# Altium PCB Twelve Volt Supply Board.PcbDoc
Units mil, origin at the board's own origin, x right, y up, seen from the top; angles counter-clockwise.
Board outline 7000 x 6407.5 mil, 4 copper layers (Top Layer, Power Plane, Ground Plane, Bottom Layer); 43 components, 12 nets, 124 pads, 2 vias.
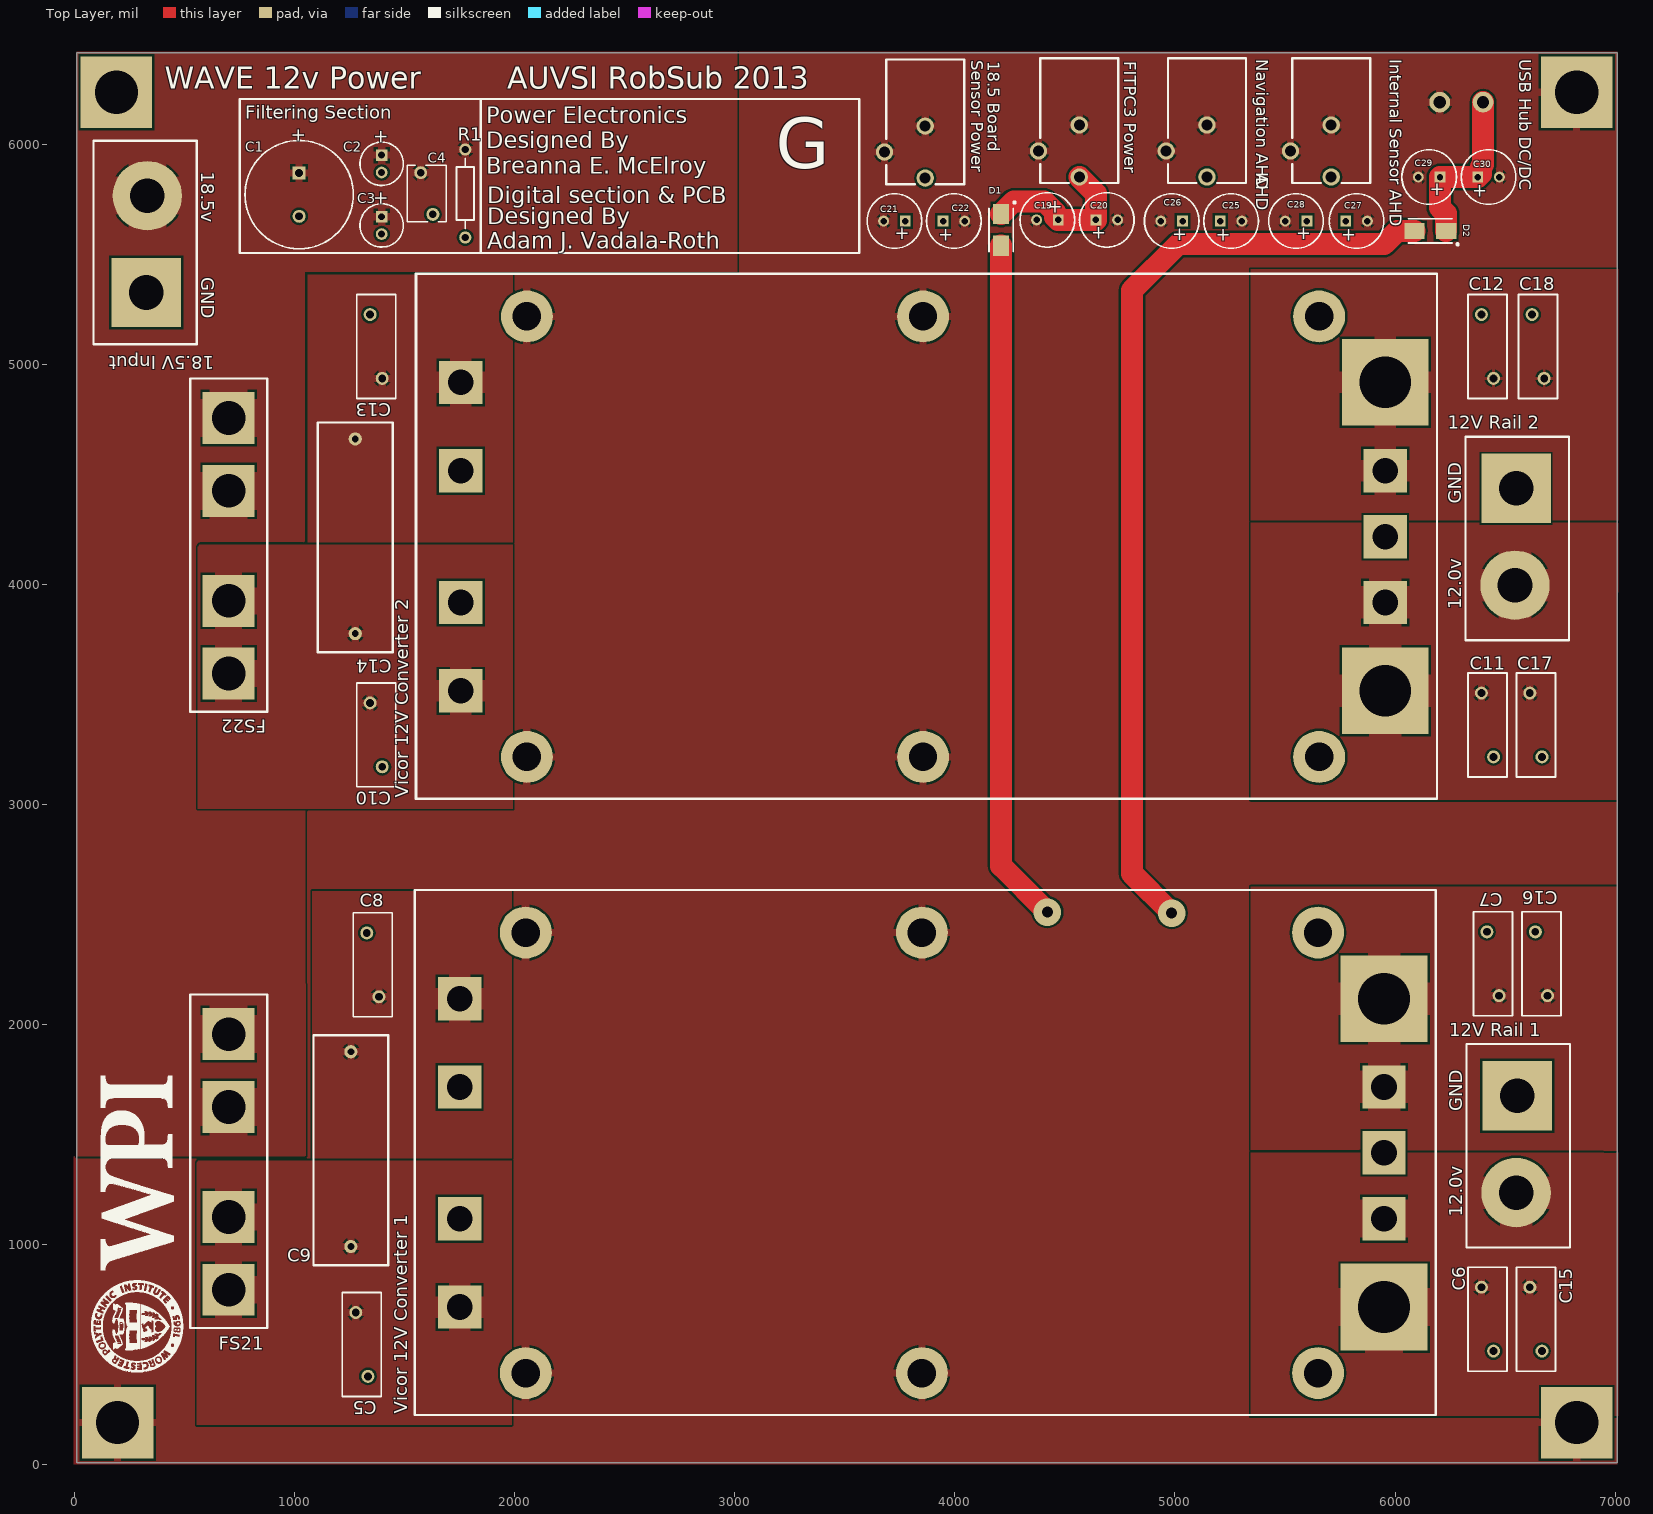
[diagram p0: Top Layer view]
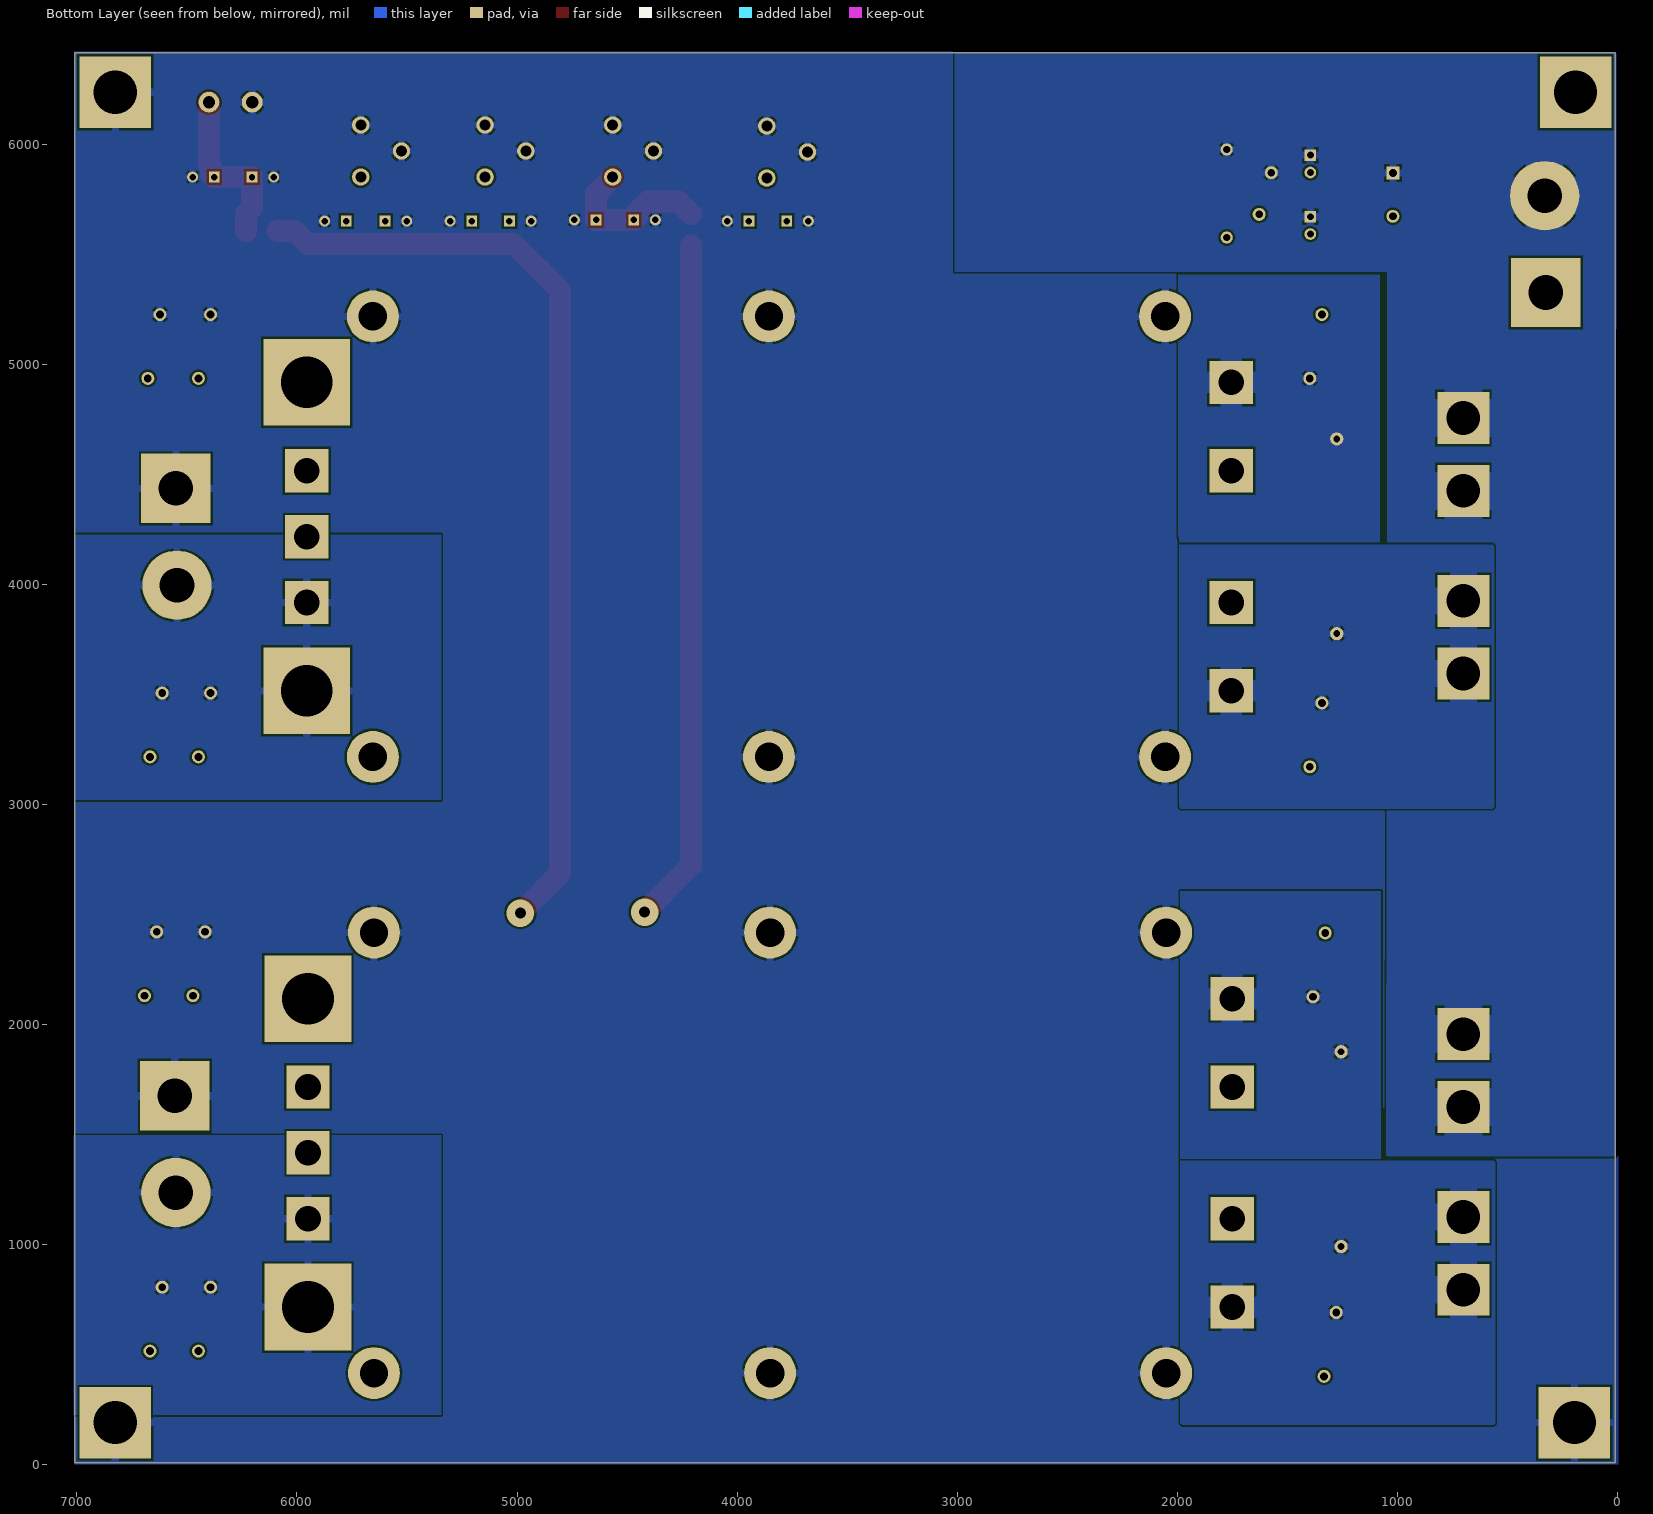
[diagram p1: Bottom Layer view, seen from below]
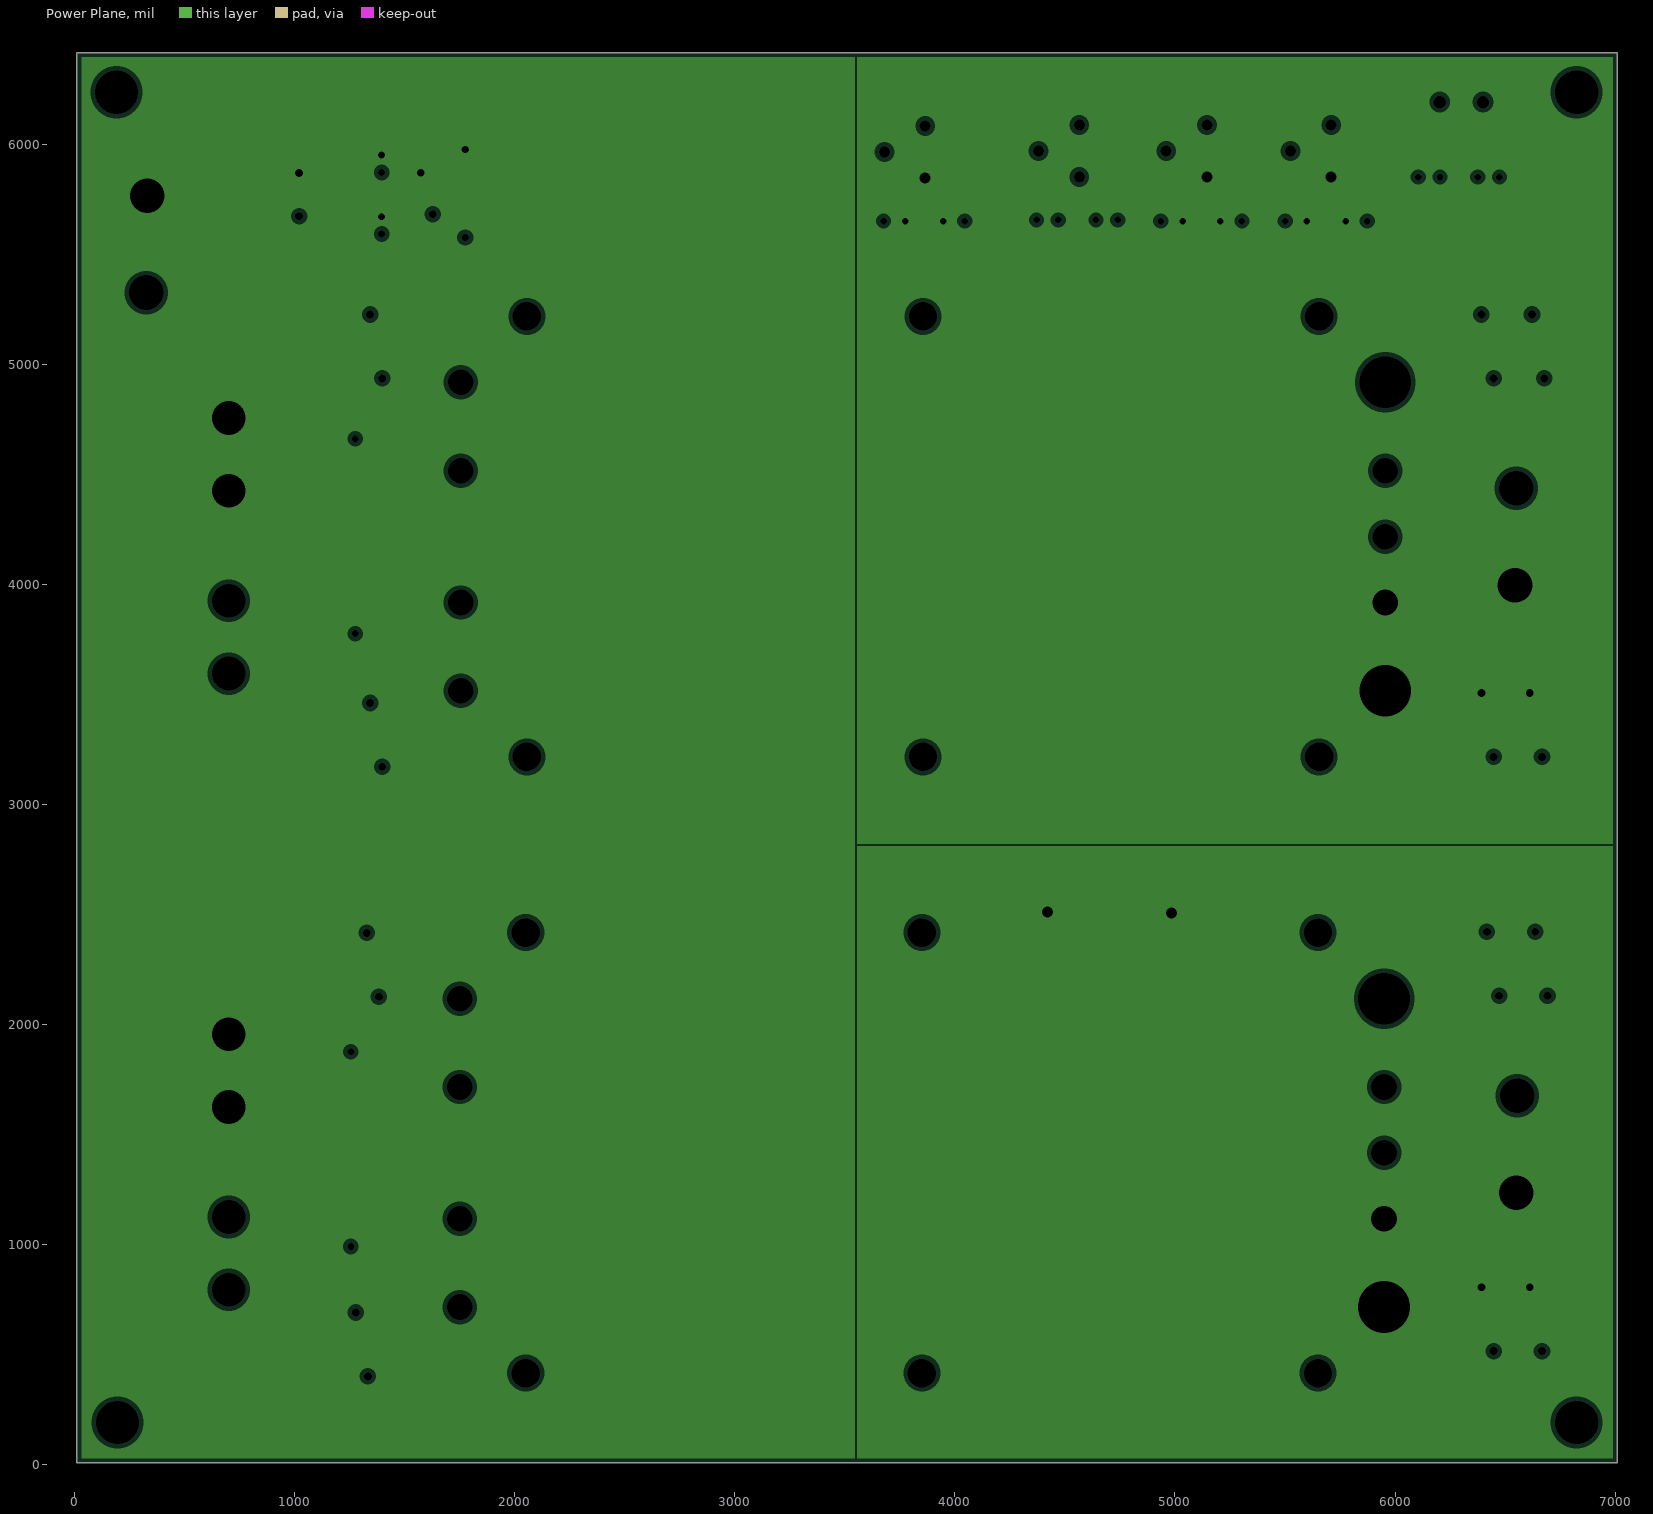
[diagram p2: Power Plane, clearances drawn from the general rule]
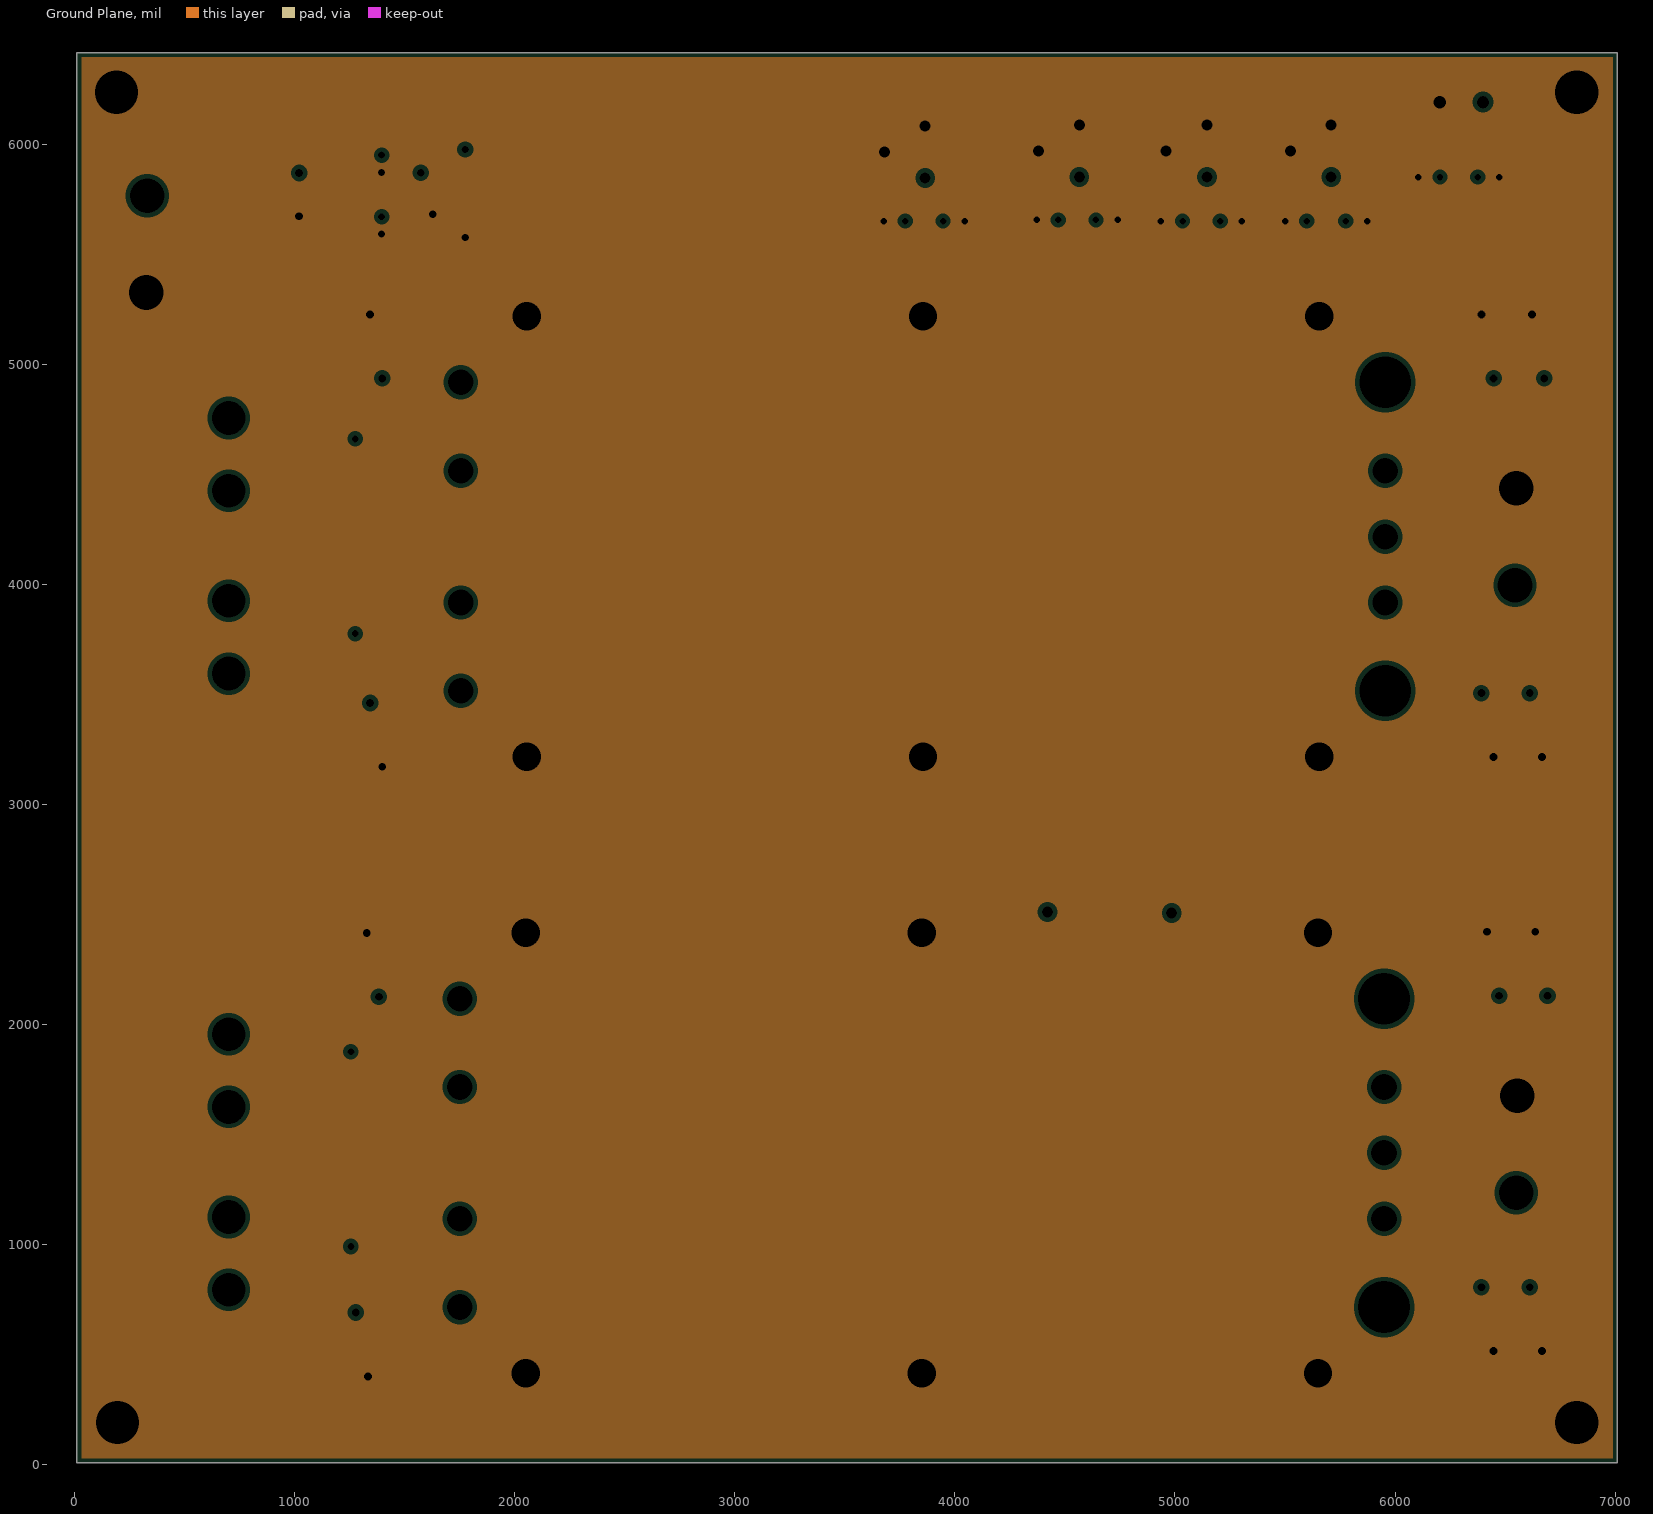
[diagram p3: Ground Plane, clearances drawn from the general rule]

## Layer stack, top to bottom
Top Layer: signal copper 1.4
Dielectric: core 12.6, FR-4, Dk 4.8
Power Plane: plane copper 1.4
Dielectric: prepreg 12.6, FR-4, Dk 4.8
Ground Plane: plane copper 1.4, net GND
Dielectric: core 12.6, FR-4, Dk 4.8
Bottom Layer: signal copper 1.4

## Board outline
10,7.5 7010,7.5 7010,6415 10,6415

## Design rules (kind name [scope] priority, off if disabled: settings)
Clearance [All] p1: gap=10
ComponentClearance [All] p1: gap=10 collisioncheckmode=3 verticalgap=100000 showdistances=FALSE
HoleSize [All] p1: absolutevalues=TRUE maxlimit=200 minlimit=1 maxpercent=80.000 minpercent=20.000
PlaneClearance [All] p1: clearance=20
PlaneConnect PlaneConnect_11 [(InNet('Net12V Rail 2_1') AND InComponent('12V Rail 2'))] p1: planeconnectstyle=Relief reliefexpansion=20 reliefentries=4 reliefconductorwidth=100 reliefairgap=10
PlaneConnect PlaneConnect_10 [(InNet('Net12V Rail 1_1') AND InComponent('12V Rail 1'))] p2: planeconnectstyle=Relief reliefexpansion=20 reliefentries=4 reliefconductorwidth=100 reliefairgap=10
PlaneConnect PlaneConnect_9 [(InNet('18.5VCC') AND InComponent('FS22'))] p3: planeconnectstyle=Relief reliefexpansion=20 reliefentries=4 reliefconductorwidth=100 reliefairgap=10
PlaneConnect PlaneConnect_8 [(InNet('18.5VCC') AND InComponent('FS21'))] p4: planeconnectstyle=Relief reliefexpansion=20 reliefentries=4 reliefconductorwidth=100 reliefairgap=10
PlaneConnect PlaneConnect_7 [(InNet('18.5VCC') AND InComponent('18.5V Input'))] p5: planeconnectstyle=Relief reliefexpansion=20 reliefentries=4 reliefconductorwidth=100 reliefairgap=10
PlaneConnect PlaneConnect_6 [(InNet('Net12V Rail 1_1') AND InComponent('C6'))] p6: planeconnectstyle=Relief reliefexpansion=20 reliefentries=4 reliefconductorwidth=35 reliefairgap=10
PlaneConnect PlaneConnect_5 [(InNet('Net12V Rail 1_1') AND InComponent('C15'))] p7: planeconnectstyle=Relief reliefexpansion=20 reliefentries=4 reliefconductorwidth=35 reliefairgap=10
PlaneConnect PlaneConnect_4 [(InNet('Net12V Rail 2_1') AND InComponent('C17'))] p8: planeconnectstyle=Relief reliefexpansion=20 reliefentries=4 reliefconductorwidth=35 reliefairgap=10
PlaneConnect PlaneConnect_3 [(InNet('Net12V Rail 2_1') AND InComponent('C11'))] p9: planeconnectstyle=Relief reliefexpansion=20 reliefentries=4 reliefconductorwidth=35 reliefairgap=10
PlaneConnect PlaneConnect_2 [(InNet('GND') AND InComponent('C8'))] p10: planeconnectstyle=Relief reliefexpansion=20 reliefentries=4 reliefconductorwidth=35 reliefairgap=10
PlaneConnect PlaneConnect_1 [(InNet('GND') AND InComponent('C5'))] p11: planeconnectstyle=Relief reliefexpansion=20 reliefentries=4 reliefconductorwidth=35 reliefairgap=10
PlaneConnect [All] p12: planeconnectstyle=Relief reliefexpansion=20 reliefentries=4 reliefconductorwidth=35 reliefairgap=15
PolygonConnect PolygonConnect_26 [(InNet('Net12V Rail 1_1') AND InComponent('12V Rail 1'))] p1: connectstyle=Relief reliefconductorwidth=150 reliefentries=4 polygonreliefangle="90 Angle"
PolygonConnect PolygonConnect_25 [(InNet('Net12V Rail 2_1') AND InComponent('12V Rail 2'))] p2: connectstyle=Relief reliefconductorwidth=150 reliefentries=4 polygonreliefangle="90 Angle"
PolygonConnect PolygonConnect_24 [(InNet('NetC12_2') AND InComponent('Vicor 12V Converter 2'))] p3: connectstyle=Relief reliefconductorwidth=150 reliefentries=4 polygonreliefangle="90 Angle"
PolygonConnect PolygonConnect_23 [(InNet('Net12V Rail 2_1') AND InComponent('Vicor 12V Converter 2'))] p4: connectstyle=Relief reliefconductorwidth=150 reliefentries=4 polygonreliefangle="90 Angle"
PolygonConnect PolygonConnect_22 [(InNet('NetC7_2') AND InComponent('Vicor 12V Converter 1'))] p5: connectstyle=Relief reliefconductorwidth=150 reliefentries=4 polygonreliefangle="90 Angle"
PolygonConnect PolygonConnect_21 [(InNet('Net12V Rail 1_1') AND InComponent('Vicor 12V Converter 1'))] p6: connectstyle=Relief reliefconductorwidth=175 reliefentries=4 polygonreliefangle="90 Angle"
PolygonConnect PolygonConnect_20 [(InNet('18.5VCC') AND InComponent('FS21'))] p7: connectstyle=Relief reliefconductorwidth=175 reliefentries=4 polygonreliefangle="90 Angle"
PolygonConnect PolygonConnect_19 [(InNet('18.5VCC') AND InComponent('FS21'))] p8: connectstyle=Relief reliefconductorwidth=175 reliefentries=4 polygonreliefangle="90 Angle"
PolygonConnect PolygonConnect_18 [(InNet('18.5VCC') AND InComponent('FS22'))] p9: connectstyle=Relief reliefconductorwidth=175 reliefentries=4 polygonreliefangle="90 Angle"
PolygonConnect PolygonConnect_17 [(InNet('18.5VCC') AND InComponent('18.5V Input'))] p10: connectstyle=Relief reliefconductorwidth=175 reliefentries=4 polygonreliefangle="90 Angle"
PolygonConnect PolygonConnect_16 [(InNet('NetC10_1') AND InComponent('FS22'))] p11: connectstyle=Relief reliefconductorwidth=125 reliefentries=4 polygonreliefangle="90 Angle"
PolygonConnect PolygonConnect_15 [(InNet('NetC5_1') AND InComponent('FS21'))] p12: connectstyle=Relief reliefconductorwidth=125 reliefentries=4 polygonreliefangle="90 Angle"
PolygonConnect PolygonConnect_14 [(InNet('Net12V Rail 1_1') AND InComponent('C6'))] p13: connectstyle=Relief reliefconductorwidth=35 reliefentries=4 polygonreliefangle="90 Angle"
PolygonConnect PolygonConnect_13 [(InNet('NetC7_2') AND InComponent('C16'))] p14: connectstyle=Relief reliefconductorwidth=35 reliefentries=4 polygonreliefangle="90 Angle"
PolygonConnect PolygonConnect_12 [(InNet('NetC7_2') AND InComponent('C7'))] p15: connectstyle=Relief reliefconductorwidth=35 reliefentries=4 polygonreliefangle="90 Angle"
PolygonConnect PolygonConnect_11 [(InNet('Net12V Rail 2_1') AND InComponent('C17'))] p16: connectstyle=Relief reliefconductorwidth=35 reliefentries=4 polygonreliefangle="90 Angle"
PolygonConnect PolygonConnect_10 [(InNet('Net12V Rail 2_1') AND InComponent('C11'))] p17: connectstyle=Relief reliefconductorwidth=35 reliefentries=4 polygonreliefangle="90 Angle"
PolygonConnect PolygonConnect_9 [(InNet('NetC12_2') AND InComponent('C12'))] p18: connectstyle=Relief reliefconductorwidth=35 reliefentries=4 polygonreliefangle="90 Angle"
PolygonConnect PolygonConnect_8 [(InNet('NetC12_2') AND InComponent('C18'))] p19: connectstyle=Relief reliefconductorwidth=35 reliefentries=4 polygonreliefangle="90 Angle"
PolygonConnect PolygonConnect_7 [(InNet('NetC13_2') AND InComponent('C13'))] p20: connectstyle=Relief reliefconductorwidth=35 reliefentries=4 polygonreliefangle="90 Angle"
PolygonConnect PolygonConnect_6 [(InNet('NetC10_1') AND InComponent('C14'))] p21: connectstyle=Relief reliefconductorwidth=35 reliefentries=4 polygonreliefangle="90 Angle"
PolygonConnect PolygonConnect_5 [(InNet('NetC10_1') AND InComponent('C10'))] p22: connectstyle=Relief reliefconductorwidth=35 reliefentries=4 polygonreliefangle="90 Angle"
PolygonConnect PolygonConnect_4 [(InNet('NetC8_2') AND InComponent('C8'))] p23: connectstyle=Relief reliefconductorwidth=35 reliefentries=4 polygonreliefangle="90 Angle"
PolygonConnect PolygonConnect_3 [(InNet('NetC8_2') AND InComponent('C9'))] p24: connectstyle=Relief reliefconductorwidth=35 reliefentries=4 polygonreliefangle="90 Angle"
PolygonConnect PolygonConnect_2 [(InNet('NetC5_1') AND InComponent('C9'))] p25: connectstyle=Relief reliefconductorwidth=35 reliefentries=4 polygonreliefangle="90 Angle"
PolygonConnect PolygonConnect_1 [(InNet('NetC5_1') AND InComponent('C5'))] p26: connectstyle=Relief reliefconductorwidth=35 reliefentries=4 polygonreliefangle="90 Angle"
PolygonConnect FitPC [InNet('NetC19_1')] p27: connectstyle=Relief reliefconductorwidth=45 reliefentries=4 polygonreliefangle="90 Angle"
PolygonConnect [All] p28: connectstyle=Relief reliefconductorwidth=35 reliefentries=4 polygonreliefangle="90 Angle"
RoutingVias [All] p1: holewidth=28 width=50 viastyle="Through Hole" minholewidth=28 minwidth=50 maxholewidth=275.59 maxwidth=50
SilkscreenOverComponentPads [All] p1: minsilkscreentomaskgap=10
SolderMaskExpansion [All] p1: expansion=4
Width [All] p1: maxlimit=200 minlimit=10 preferedwidth=10
23 further rules are at their usual default settings.

## Classes and differential pairs
component class "Vicor Converter 1": "12V Rail 1" "18.5V Input" C1 C2 C3 C4 C5 C6 C7 C8 C9 C15 C16 C19 C20 C29 C30 D1 D2 "FITPC3 Power" FS21 R1 "USB Hub DC/DC" "Vicor 12V Converter 1"
component class "Vicor Converter 2": "12V Rail 2" "18.5 Board" C10 C11 C12 C13 C14 C17 C18 C21 C22 C25 C26 C27 C28 FS22 "Internal Sensor AHD" "Navigation AHD" "Vicor 12V Converter 2"

## Components (designator, comment, footprint, x,y, rotation, side; value= is the part's Value field where it differs from the comment)
"12V Rail 1" "12 Power Rail" "Power Rail 12" 6550,1235 r90 top
"12V Rail 2" "12 Power Rail" "Power Rail 12" 6545,3995 r90 top
"18.5 Board" "Center-positive 2.1 mm power jack" PJ-102AH 3865,5845 r0 top (schematic designator "18.5 Board Sensor Power")
"18.5V Input" "18.5 Power Rail" "Power Rail Pad" 330,5765 r270 top
C1 "" CAPPR5-12.5x40 1020,5770 r270 top
C2 "" CAPPR2-5x11 1395,5910 r270 top
C3 "" CAPPR2-5x11 1395,5630 r270 top
C4 "" CAPRD5-6.5x4.5 1600,5775 r270 top
C5 "Cap" CAPRD7.5-12x4.5 1305,545 r270 top
C6 "Cap" CAPRD7.5-12x4.5 6420,660 r270 top
C7 "Cap" CAPRD7.5-12x4.5 6445,2275 r270 top
C8 "" CAPRD7.5-12x4.5 1355,2270 r270 top
C9 "Cap" "Vicor AC CAP 0.22uF 250VAC" 1255,1875 r270 top
C10 "Cap" CAPRD7.5-12x4.5 1370,3315 r270 top
C11 "Cap" CAPRD7.5-12x4.5 6420,3360 r270 top
C12 "Cap" CAPRD7.5-12x4.5 6420,5080 r270 top
C13 "Cap" CAPRD7.5-12x4.5 1370,5080 r270 top
C14 "Cap" "Vicor AC CAP 0.22uF 250VAC" 1275,4660 r270 top
C15 "Cap" CAPRD7.5-12x4.5 6640,660 r270 top
C16 "Cap" CAPRD7.5-12x4.5 6665,2275 r270 top
C17 "Cap" CAPRD7.5-12x4.5 6640,3360 r270 top
C18 "Cap" CAPRD7.5-12x4.5 6650,5080 r270 top
C19 "Cap Pol1" CAPPR2.5-6.3x5 4420,5655 r180 top
C20 "Cap Pol1" CAPPR2.5-6.3x5 4690,5655 r0 top
C21 "Cap Pol1" CAPPR2.5-6.3x5 3725,5650 r180 top
C22 "Cap Pol1" CAPPR2.5-6.3x5 3995,5650 r0 top
C25 "Cap Pol1" CAPPR2.5-6.3x5 5255,5650 r0 top
C26 "Cap Pol1" CAPPR2.5-6.3x5 4985,5650 r180 top
C27 "Cap Pol1" CAPPR2.5-6.3x5 5825,5650 r0 top
C28 "Cap Pol1" CAPPR2.5-6.3x5 5550,5650 r180 top
C29 "Cap Pol1" CAPPR2.5-6.3x5 6155,5850 r180 top
C30 "Cap Pol1" CAPPR2.5-6.3x5 6425,5850 r0 top
D1 "PMEG4050EP" "NXP Schottkey reverse" 4215,5600 r0 top
D2 "PMEG4050EP" "NXP Schottkey reverse" 6150,5600 r270 top
"FITPC3 Power" "Center-positive 2.1 mm power jack" PJ-102AH 4565,5850 r0 top
FS21 "M60 Automotive Fuse Socket" M60 700,1955 r270 top
FS22 "M60 Automotive Fuse Socket" M60 700,4755 r270 top
"Internal Sensor AHD" "Center-positive 2.1 mm power jack" PJ-102AH 5710,5850 r0 top
"Navigation AHD" "Center-positive 2.1 mm power jack" PJ-102AH 5145,5850 r0 top
R1 "Res2" AXIAL-0.4 1775,5775 r90 top
"USB Hub DC/DC" "282856-2" 282856-2 6400,6190 r180 top
"Vicor 12V Converter 1" "V28A12M200B" "Vicor Maxi DC DC Converter" 5950,715 r90 top
"Vicor 12V Converter 2" "V28A12M200B" "Vicor Maxi DC DC Converter" 5955,3515 r90 top

## Footprints (in the part's own frame and the unit in brackets; to place one, negate y for a bottom-side part, rotate by r counter-clockwise, add the part's x,y. Pads: shape width x height; smd on the part's side, far side on the other; paste and mask are expansions set on the pad)
282856-2 [mm] "Screw Terminal  two pole"
  round 2.4 hole 1.4: 1(0,0) 2(5,0)
AXIAL-0.4 [mm] "Axial Device, Thru-Hole; 2 Leads; 0.4 in Pin Spacing"
  round 1.4 hole 0.85: 1(-5.08,0) 2(5.08,0)
  silkscreen extent -4.06,-1.02 4.06,1.02
CAPPR2-5x11 [mm] "Capacitor, Electrolytic, Radial; Body 5 x 11 mm (Dia.xH typ); Pin Spacing 2 mm (typ)"
  rect 1.35x1.35 hole 0.8: 1(-1,0)
  round 1.35 hole 0.8: 2(1,0)
  silkscreen extent -2.5,-2.5 2.5,2.5
CAPPR2.5-6.3x5 [mm] "Capacitor, Electrolytic, Radial; Body 6.3 x 5 mm (Dia.xH typ); Pin Spacing 2.5 mm (typ)"
  rect 1.25x1.25 hole 0.75: 1(-1.25,0)
  round 1.25 hole 0.75: 2(1.25,0)
  silkscreen extent -3.15,-3.15 3.15,3.15
CAPPR5-12.5x40 [mm] "Capacitor, Electrolytic, Radial; Body 12.5 x 40 mm (Dia.xH typ); Pin Spacing 5 mm (typ)"
  rect 1.5x1.5 hole 0.9: 1(-2.5,0)
  round 1.5 hole 0.9: 2(2.5,0)
  silkscreen extent -6.25,-6.25 6.25,6.25
CAPRD5-6.5x4.5 [mm] "Capacitor, Ceramic, Thru-Hole, Disc; Body 6.5 x 4.5 mm (LxW max) Pin Spacing 5 mm (typ)"
  round 1.5 hole 0.9: 1(-2.4,-0.7) 2(2.4,0.7)
  silkscreen extent -3.25,-2.25 3.25,2.25
CAPRD7.5-12x4.5 [mm] "Capacitor, Ceramic, Thru-Hole, Disc; Body 12 x 4.5 mm (LxW max) Pin Spacing 7.5 mm (typ)"
  round 1.5 hole 0.9: 1(-3.684,-0.7) 2(3.684,0.7)
  silkscreen extent -6,-2.25 6,2.25
M60 [mm] "Automotive fuse carrier"
  rect 6x6 hole 3.9: 1(0,0) 2(8.4,0) 3(21.1,0) 4(29.5,0)
  silkscreen extent -4.57,-4.45 33.91,4.45
"NXP Schottkey reverse" [mm]
  rect 1.85x2.35 smd: 1(-0.127,-1.571) 2(-0.127,2.079)
  silkscreen extent -1.53,-2.25 1.55,3.53, body extent -1.48,-2.25 1.22,2.75, height 1.1
PJ-102AH [mm] "Center positive 2.1 mm power jack"
  round 2 hole 1.27: 1(0,0) 2(0,6) 3(-4.7,3)
  silkscreen extent -4.5,-0.7 4.5,13.7, body extent -5.8,-0.7 4.5,13.7, height 11
"Power Rail 12" [mm]
  round 8 hole 4: 1(0,0)
  rect 8x8 hole 4: 2(11.176,-0.127)
  silkscreen extent -6.35,-6.22 17.14,5.72
"Power Rail Pad" [mm] "Custom pad for WAVE power rails"
  round 8 hole 4: 1(0,0)
  rect 8x8 hole 4: 2(11.176,-0.127)
  silkscreen extent -6.35,-6.22 17.14,5.72
"Vicor AC CAP 0.22uF 250VAC" [mil] "Vicor AC CAP"
  round 60 hole 31: 1(0,0) 2(885,0)
  silkscreen extent -75,-170 970,170
"Vicor Maxi DC DC Converter" [mm] "Vicor Maxi DC DC Converter"
  rect 5x5 hole 2.96: 1(0,106.7) 1(35.6,106.7) 2(10.2,106.7) 3(25.4,106.7) 6(25.4,0) 7(17.8,0) 8(10.2,0)
  rect 10x10 hole 5.96: 5(35.6,0) 9(0,0)
  round 6 hole 3.28: 10(43.22,99.06) 11(43.22,53.34) 12(43.22,7.62) 13(-7.62,99.06) 14(-7.62,53.34) 15(-7.62,7.62)
  silkscreen extent -12.45,-6 48.13,111.84

## Part data
"18.5 Board" "FITPC3 Power" "Internal Sensor AHD" "Navigation AHD": library part PWR2.5, "Power jack"
C1 C2 C3 C4 C8: library part Cap, "Capacitor"
C5 C6 C7 C9 C10 C11 C12 C13 C14 C15 C16 C17 C18: "Capacitor"
C19 C20 C21 C22 C25 C26 C27 C28 C29 C30: "Polarized Capacitor (Radial)"
D1 D2: library part Diode, "Default Diode"
FS21 FS22: library part "M60 Automotive Fuse", "Automotive Fuse Socket"
R1: "Resistor"
"USB Hub DC/DC": "Two pole screw terminal"
"Vicor 12V Converter 1" "Vicor 12V Converter 2": "V28A12M200B 12V DC/DC Converter"

## Free pads (board coordinates)
  rect 325x325 hole 196.85: ""(190,6235) ""(195,190) ""(6825,190) ""(6825,6235)

## Via types
v1: diameter 125, hole 50, Top Layer to Bottom Layer, 2 vias

## Nets (pads, with @x,y where several pads share a name; then routed paths per layer and width w, separated by ;. In a path a pad name is that pad's centre, name@x,y a point inside that pad or via, vN(x,y) a via of type N, cw(c..) or ccw(c..) an arc to the next point about the centre after c; other vN are vias at no path point)
18.5VCC: "18.5V Input.1" C1.1 C2.1 C3.1 C4.1 FS21.1 FS21.2 FS22.1 FS22.2 R1.2
GND: "12V Rail 1.2" "12V Rail 2.2" "18.5 Board.2" "18.5 Board.3" "18.5V Input.2" "FITPC3 Power.2" "FITPC3 Power.3" "Internal Sensor AHD.2" "Internal Sensor AHD.3" "Navigation AHD.2" "Navigation AHD.3" "USB Hub DC/DC.2" "Vicor 12V Converter 1.10" "Vicor 12V Converter 1.11" "Vicor 12V Converter 1.12" "Vicor 12V Converter 1.13" "Vicor 12V Converter 1.14" "Vicor 12V Converter 1.15" "Vicor 12V Converter 2.10" "Vicor 12V Converter 2.11" "Vicor 12V Converter 2.12" "Vicor 12V Converter 2.13" "Vicor 12V Converter 2.14" "Vicor 12V Converter 2.15" C1.2 C2.2 C3.2 C4.2 C5.2 C6.2 C7.1 C8.1 C10.2 C11.2 C12.1 C13.1 C15.2 C16.1 C17.2 C18.1 C19.2 C20.2 C21.2 C22.2 C25.2 C26.2 C27.2 C28.2 C29.2 C30.2 pad. R1.1
"Net12V Rail 1_1": "12V Rail 1.1" "Vicor 12V Converter 1.8" "Vicor 12V Converter 1.9" C6.1 C15.1 D1.1 D2.1 | length 7414.7
  Top Layer w100: D1.1 4210,2720 v1(4420,2510) ; v1(4985,2505) 4805,2685 4805,5335 5015,5545 5950,5545 6010,5605 D2.1
"Net12V Rail 2_1": "12V Rail 2.1" "18.5 Board.1" "Internal Sensor AHD.1" "Navigation AHD.1" "Vicor 12V Converter 2.8" "Vicor 12V Converter 2.9" C11.1 C17.1 C21.1 C22.1 C25.1 C26.1 C27.1 C28.1
NetC5_1: "Vicor 12V Converter 1.1"@1749.21,715 C5.1 C9.2 FS21.3 FS21.4
NetC7_2: "Vicor 12V Converter 1.5" "Vicor 12V Converter 1.6" C7.2 C16.2
NetC8_2: "Vicor 12V Converter 1.1"@1749.21,2116.57 C8.2 C9.1
NetC10_1: "Vicor 12V Converter 2.1"@1754.21,3515 C10.1 C14.2 FS22.3 FS22.4
NetC12_2: "Vicor 12V Converter 2.5" "Vicor 12V Converter 2.6" C12.2 C18.2
NetC13_2: "Vicor 12V Converter 2.1"@1754.21,4916.57 C13.2 C14.1
NetC19_1: "FITPC3 Power.1" C19.1 C20.1 D1.2 | length 728.6
  Top Layer w100: D1.2 4267.76,5739.61 4405.83,5739.61 4455.39,5690.05 4455.39,5668.82 C19.1 C20.1 4640.79,5774.21 4565,5850
NetC29_1: "USB Hub DC/DC.1" C29.1 C30.1 D2.2 | length 778.1
  Top Layer w100: D2.2 6231.85,5683.15 6204.21,5710.79 C29.1 C30.1 6389.61,5863.82 6389.61,5895.44 6400,5905.83 6400,6190
pads on no net: "Vicor 12V Converter 1.2" "Vicor 12V Converter 1.3" "Vicor 12V Converter 1.7" "Vicor 12V Converter 2.2" "Vicor 12V Converter 2.3" "Vicor 12V Converter 2.7"

## Polygon pours and split planes (outlines as drawn)
"Net12V Rail 1_1" on Top Layer "Power Plane-No Net" (solid, pour order 26): 5345,1415 5345,220 7015,220 7015,1415
NetC5_1 on Top Layer "Power Plane-No Net" (solid, pour order 30): 1985,1380 562.22,1380 555,1369.96 555,180 1985,180
NetC8_2 on Top Layer "Power Plane-No Net" (solid, pour order 34): 1080,1380 1080,2605 1985,2605 1985,1380
"Net12V Rail 2_1" on Top Layer "Power Plane-No Net" (solid, pour order 25): 5345,4280 5345,3020 7009.51,3020 7015,4280
NetC12_2 on Top Layer "Power Plane-No Net" (solid, remove dead copper, pour order 22): 5345,4290 5345,5430 7015,5430 7015,4290
NetC7_2 on Top Layer "Power Plane-No Net" (solid, pour order 21): 5345,1430.29 5345,2625 7010,2625 7010,1425
NetC13_2 on Top Layer "Power Plane-No Net" (solid, pour order 33): 1060,4180 1060,5405 1990,5405 1990,4180
NetC10_1 on Top Layer "Power Plane-No Net" (solid, pour order 29): 1990,4180 567.22,4180 560,4169.96 560,2980 1990,2980
18.5VCC on Top Layer "Power Plane-No Net" (solid, pour order 20): 10,1400 1050,1400 1045,4205 1045,5420 3010,5420 3010,6420 10,6420
GND on Top Layer "Power Plane-No Net" (solid, remove dead copper, pour order 36): 0,0 7010,0 7010,55 7010,6420 6625,6420 0,6420 -5,6415 -5,0
NetC5_1 on Bottom Layer "Power Plane-No Net" (solid, pour order 28): 555,180 1977.78,180 1985,188.02 1985,1379.69 562.22,1379.69 555,1371.66 555,188.02 562.22,180
"Net12V Rail 1_1" on Bottom Layer "Power Plane-No Net" (solid, pour order 23): 5345,1495 5345,225 7015,225 7015,1495
NetC8_2 on Bottom Layer "Power Plane-No Net" (solid, pour order 32): 1075,1380 1075,2605 1985,2605 1985,1380
"Net12V Rail 2_1" on Bottom Layer "Power Plane-No Net" (solid, pour order 24): 5345,4225 5345,3020 7010,3020 7010,4225
NetC13_2 on Bottom Layer "Power Plane-No Net" (solid, pour order 31): 1080,4180 1080,5405 1995,5405 1995,4180
NetC10_1 on Bottom Layer "Power Plane-No Net" (solid, pour order 27): 560,2980 1982.78,2980 1990,2988.02 1990,4179.69 567.22,4179.69 560,4171.66 560,2988.02 567.22,2980
18.5VCC on Bottom Layer "Power Plane-No Net" (solid, pour order 19): 10,1400 1050,1400 1045,4205 1045,5420 3010,5420 3010,6415 5,6415
GND on Bottom Layer "Power Plane-No Net" (solid, remove dead copper, pour order 35): 0,0 7010,0 7010,55 7010,6420 6625,6420 0,6420 -5,6415 -5,0
"Net12V Rail 2_1" on Power Plane (split plane): 6989.9,2820.1 3555.1,2820.1 3555.1,6394.9 6989.9,6394.9
"Net12V Rail 1_1" on Power Plane (split plane): 6989.9,27.6 3555.1,27.6 3555.1,2809.9 6989.9,2809.9
18.5VCC on Power Plane (split plane): 3544.9,27.6 30.1,27.6 30.1,6394.9 3544.9,6394.9
GND on Ground Plane (split plane): 6989.9,27.6 30.1,27.6 30.1,6394.9 6989.9,6394.9

## Other copper
Power Plane (plane layer: these items are gaps in the copper):
  lines w10: 3550,7.5 3550,6415 ; 3550,2815 7010,2815

## Silkscreen, mask and mechanical layers (free items; w line width, h text height)
Top Overlay:
  drawing of 31 lines, arcs and shapes, not listed
  text "Sensor Power" at 4075,6380 h55 r270
  text "WAVE 12v Power" at 410,6250 h100
  text "AUVSI RobSub 2013" at 1965,6250 h100
  text "Filtering Section" at 775,6115 h60
  text "Power Electronics" at 1870,6095 h75
  text "Designed By" at 1870,5980 h75
  text "Breanna E. McElroy" at 1870,5865 h75
  text "AHD" at 5370,5865 h55 r270
  text "G" at 3185,5815 h393.7
  text "Digital section & PCB" at 1875,5730 h75
  text "Designed By" at 1875,5635 h75
  text "Adam J. Vadala-Roth" at 1875,5525 h75
Mechanical 15:
  the board outline again, w5

## Text inside footprints (layer, text, board x,y; h text height)
"12V Rail 1": Top Overlay "GND" at 6305,1605 h60 r90; Top Overlay "12.0v" at 6305,1125 h60 r90
"12V Rail 2": Top Overlay "GND" at 6300,4365 h60 r90; Top Overlay "12.0v" at 6300,3885 h60 r90
"18.5V Input": Top Overlay "GND" at 575,5395 h60 r270; Top Overlay "18.5v" at 575,5875 h60 r270
C1: Top Overlay "+" at 990.47,6074.13 h59.06 r270
C2: Top Overlay "+" at 1365.47,6066.5 h59.05 r270
C3: Top Overlay "+" at 1365.47,5786.5 h59.05 r270
C19: Top Overlay "+" at 4490,5740 h59.06 r180
C20: Top Overlay "+" at 4620,5570 h59.06
C21: Top Overlay "+" at 3795,5620 h59.06 r180
C22: Top Overlay "+" at 3925,5560 h59.06
C25: Top Overlay "+" at 5185,5560 h59.06
C26: Top Overlay "+" at 5055,5615 h59.06 r180
C27: Top Overlay "+" at 5755,5560 h59.06
C28: Top Overlay "+" at 5620,5620 h59.06 r180
C29: Top Overlay "+" at 6225,5820 h59.06 r180
C30: Top Overlay "+" at 6350,5760 h59.06